# Allegro board 7A.brd
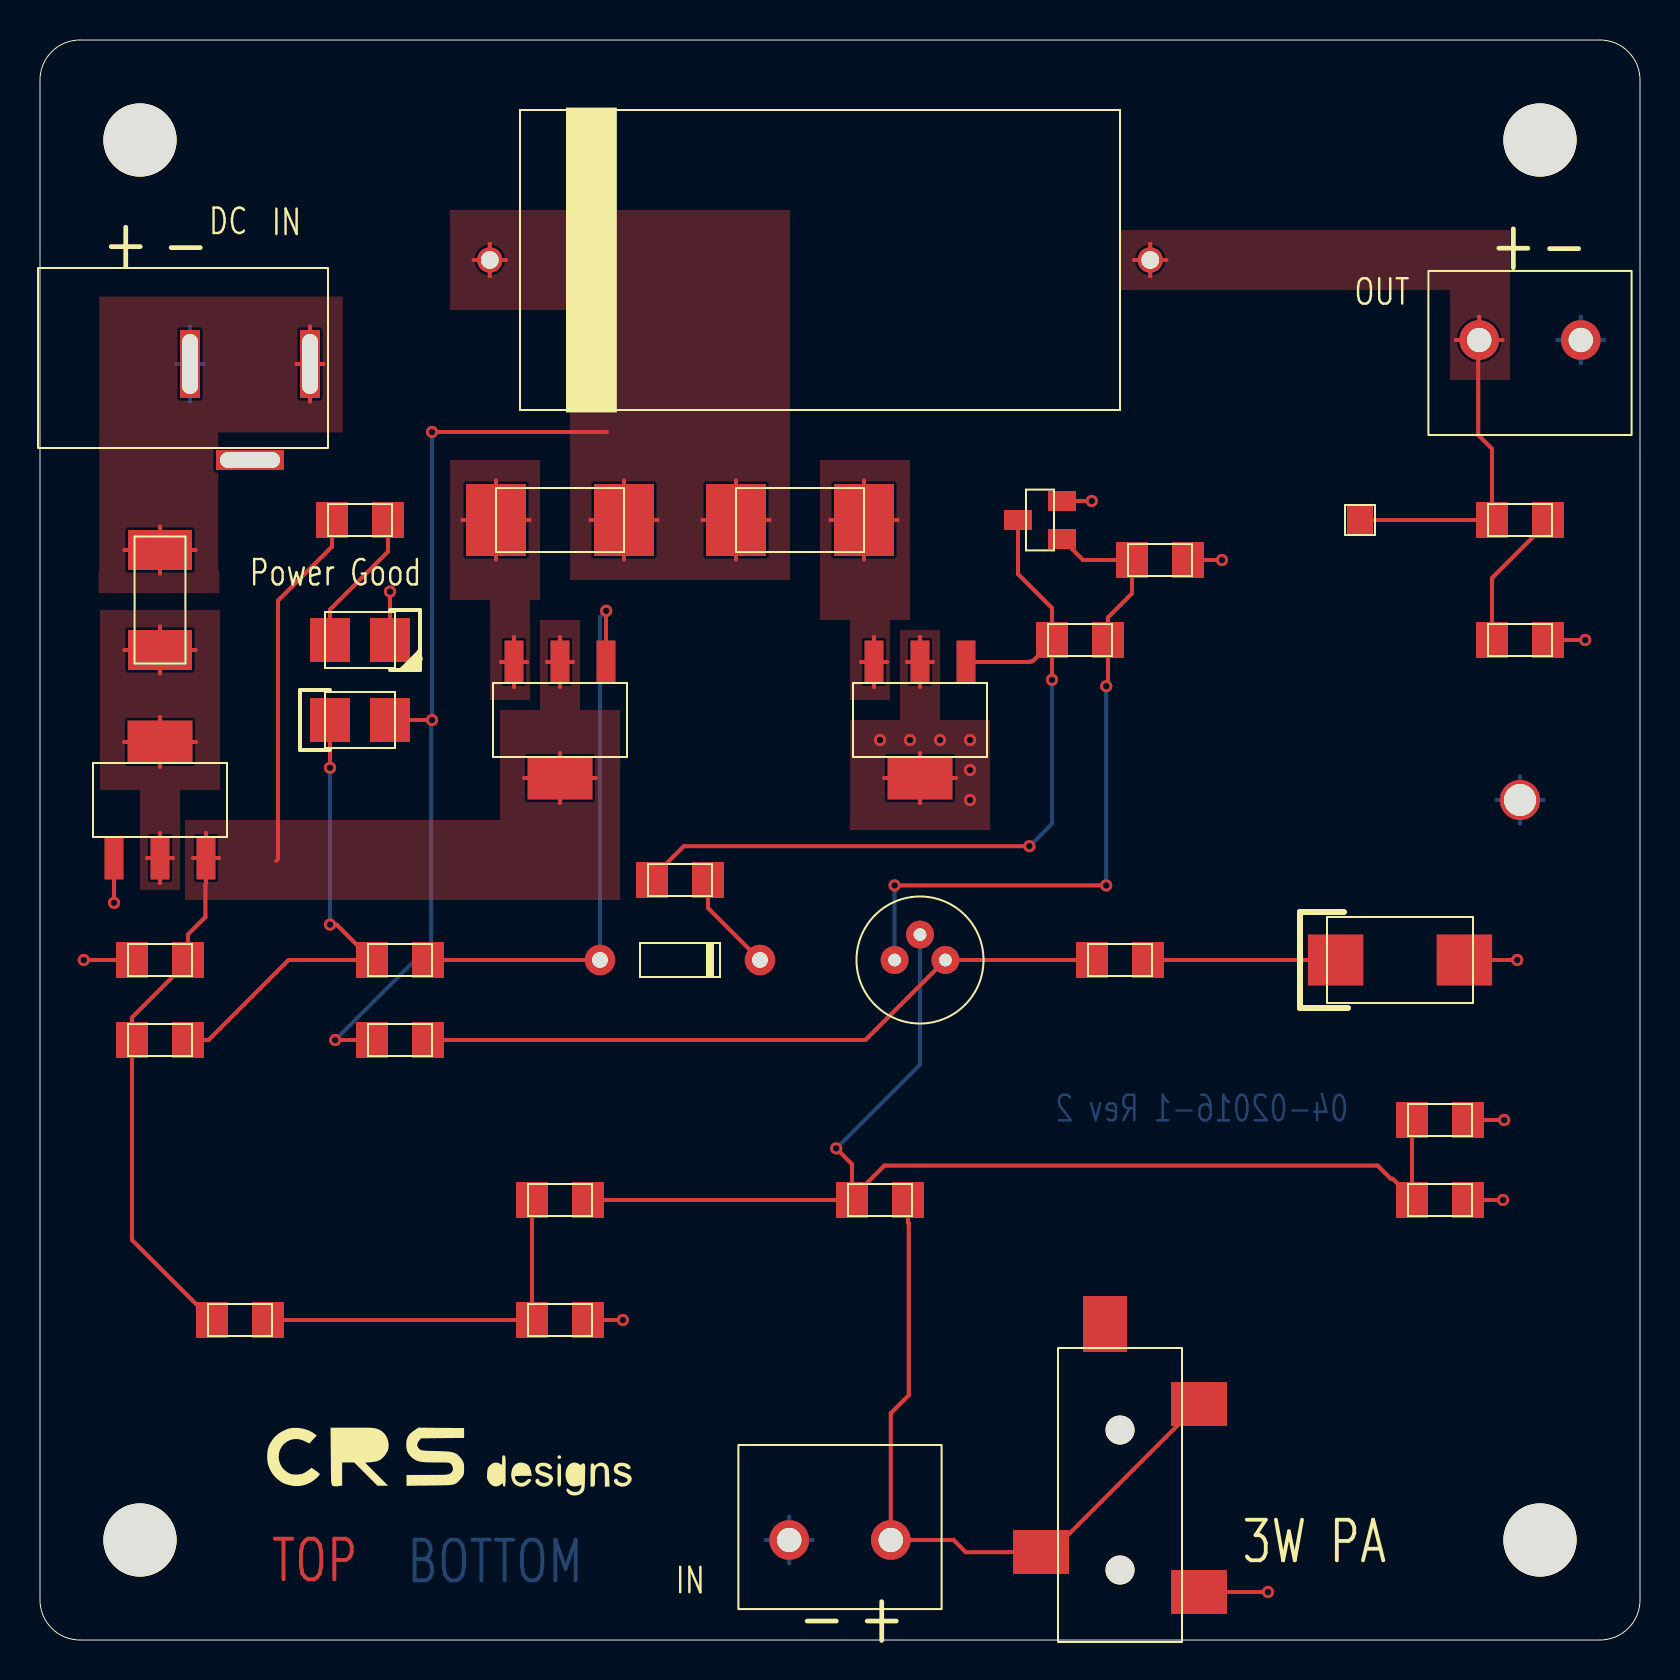
[diagram p0: board, top side]
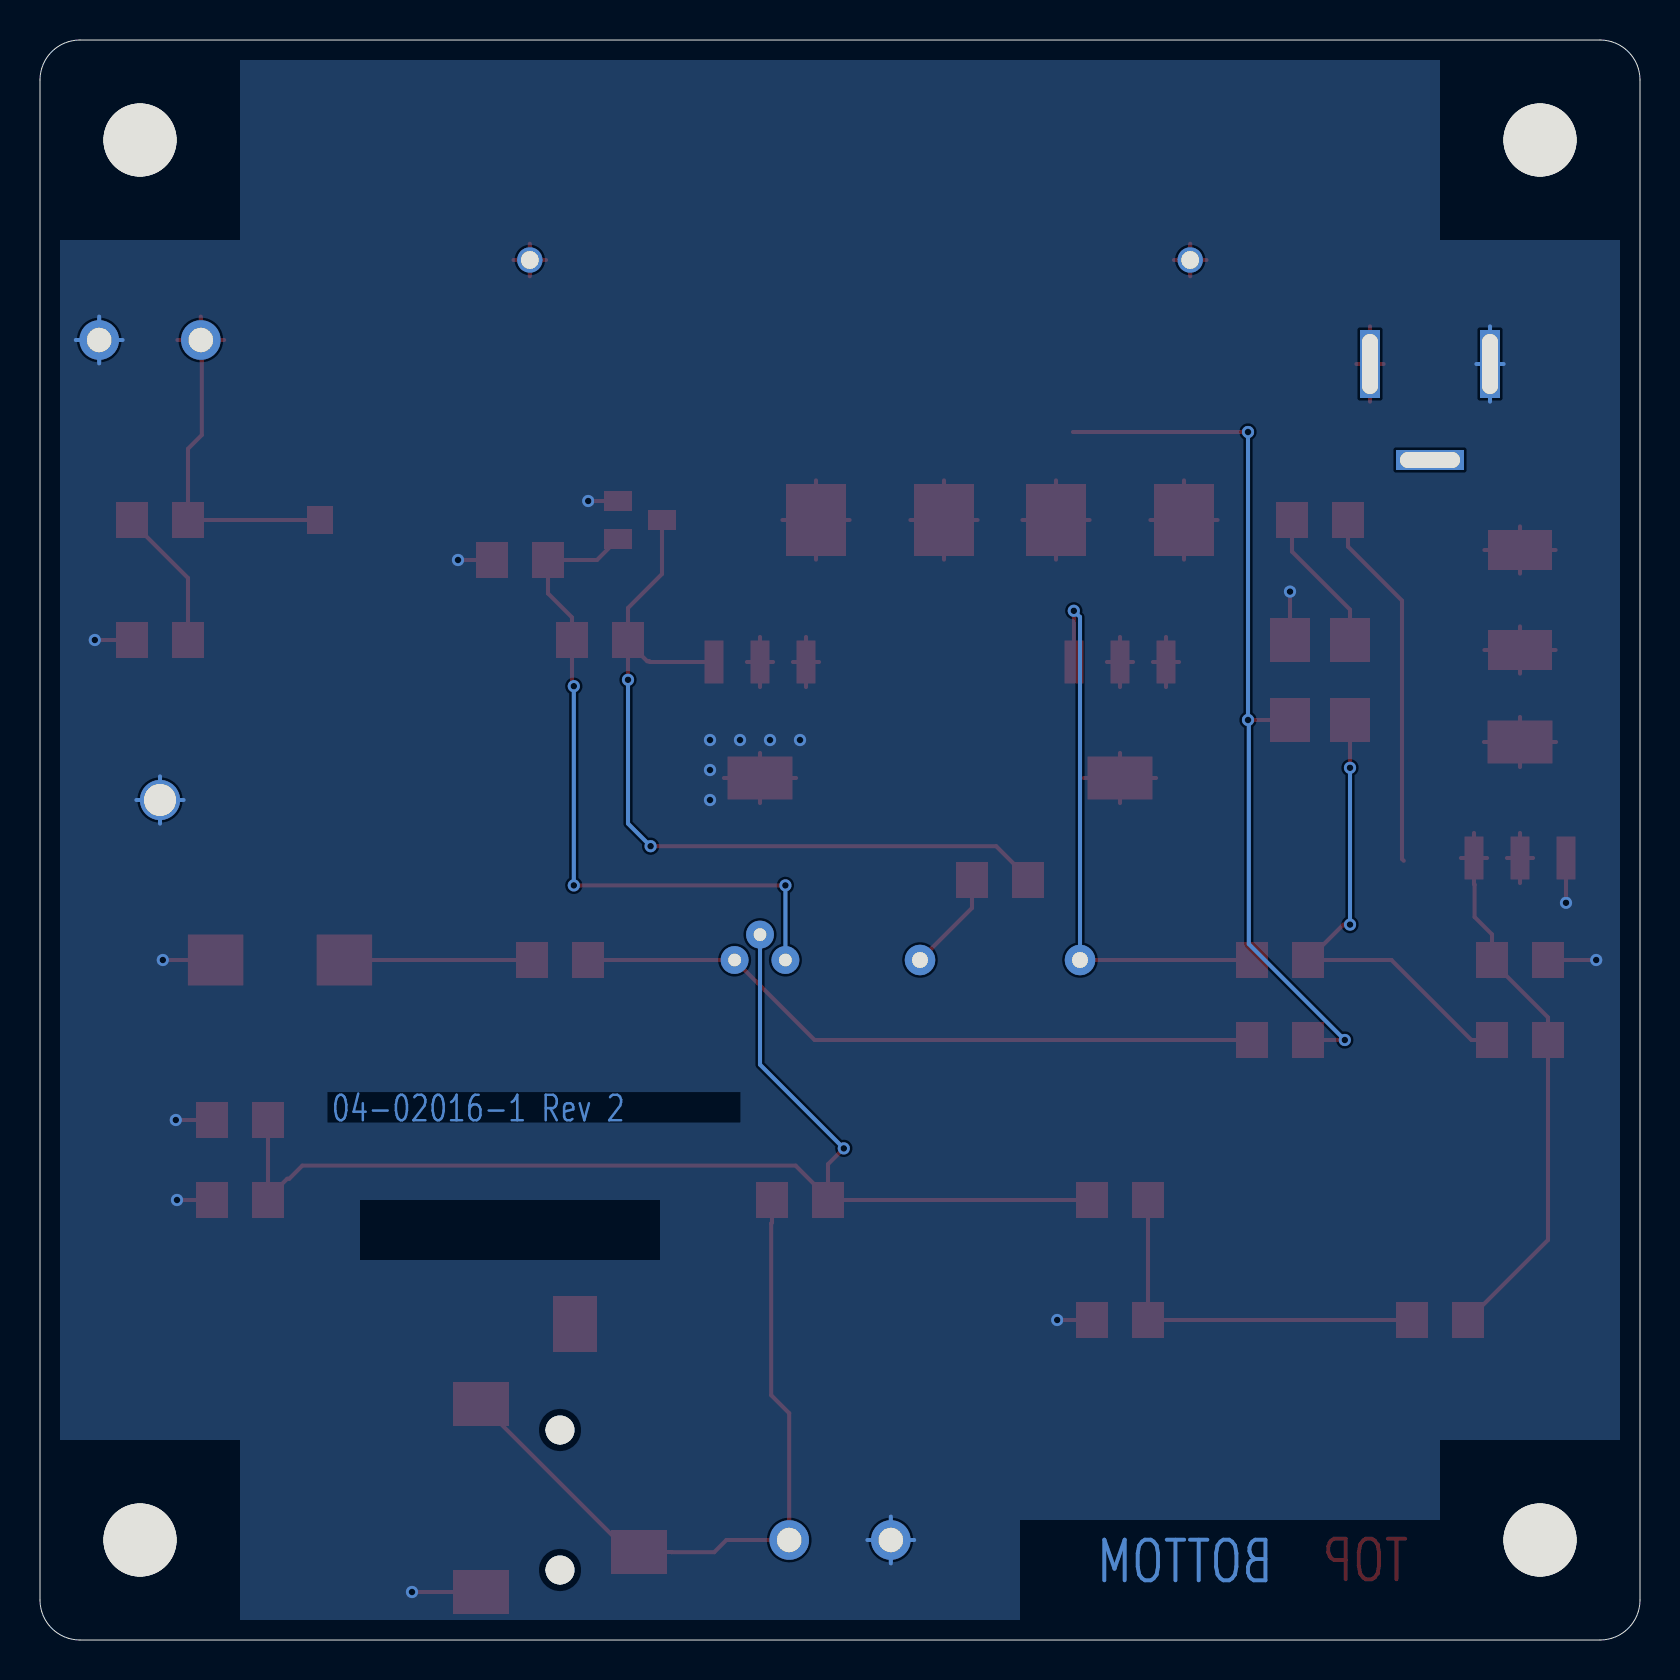
[diagram p1: board, bottom side, seen from below]

Outline 80 x 80 mm; copper layers: TOP, BOTTOM. Coordinates in mm from the lower left corner of the outline.
Outline path: 0,78 0,2 arc(0.59,0.59) 2,0 78,0 arc(79.41,0.59) 80,2 80,78 arc(79.41,79.41) 78,80 2,80 arc(0.59,79.41) 0,78

## Design rules (mm)
constraint set DEFAULT: min track width 0.203

## Placement (name value [footprint] x y rotation side)
C1  0.1u  [CAPC320160X100]  42 22 180 top
C2  10u  [CAPC320160X180]  26 16 0 top
C3  22p  [CAPC320160X100]  70 26 0 top
C4  100u  [CAPMP730430X430]  68 34 0 top
C5  47u  [CAPMP350280X210]  16 46 0 top
C6  22p  [CAPC320160X100]  52 50 180 top
C7  0.1  [CAPC320160X100]  6 34 180 top
C8  1000u  [CAPPA460W80L300D150B]  39 69 0 top
C9  0.1u  [CAPC320160X100]  74 50 0 top
D1  1N4148  [DIOAD800W060L400D170]  32 34 0 top
F1  VTR2/6125FF2-R  [FUSM610254X254]  6 52 90 top
J1  282837-2  [TE_282837-2]  40 5 90 top
J3  282837-2  [TE_282837-2]  74.5 65 270 top
J4  SJ-3524  [CUI_SJ3525]  54 0 90 top
J9  694106301002  [WURTH_694106301002]  10.5 59 90 top
LED1  150141BS73100  [LEDM320280X190]  16 50 180 top
NOREF  -  []  5 17 0 top
NOREF#2  -  [unnamed#2]  75 5 0 top
NOREF#3  -  [unnamed#2]  5 5 0 top
NOREF#4  -  []  11 7 0 top
NOREF#5  -  [unnamed#2]  75 75 0 top
NOREF#6  -  [unnamed#2]  5 75 0 top
Q1  2N5087  [TO18F]  44 34 0 top
Q2  2N3904  [SOT095P240X120-3]  50 56 180 top
Q3  FZT649  [SOT230P700X180-4]  26 46 270 top
Q4  FZT790A  [SOT230P700X180-4]  44 46 270 top
Q5  NDT2955  [SOT230P700X180-4]  6 42 90 top
R1  100k  [RESC320160X100]  10 16 0 top
R2  820k  [RESC320160X100]  26 22 0 top
R3  820k  [RESC320160X100]  70 22 0 top
R4  10k  [RESC320160X100]  56 54 0 top
R5  120  [RESC320160X100]  54 34 0 top
R6  2.7k  [RESC320160X100]  18 30 180 top
R7  220  [RESC320160X100]  6 30 0 top
R8  220  [RESC320160X100]  18 34 0 top
R9  18  [RESC320160X100]  32 38 180 top
R10  0.82  [RESC640320X070]  26 56 0 top
R11  0.82  [RESC640320X070]  38 56 0 top
R12  1  [RESC320160X100]  74 56 0 top
R14  15.0k  [RESC320160X100]  16 56 180 top
TP1  TEST POINT  [KEYSTONE_5010]  74 42 0 top
TP2  T POINT F  [TP_1_3X1_4]  66 56 0 top

## Library data of the parts
C1-C3 C6 C7 C9 = C
C4 C5 C8 = CP
D1 = DIODE_0
F1 = SST_0
J1 J3 = JUMPER
J4 = TRS_Jack
J9 = BARREL JACK
LED1 = SFH4650
Q1 = PNP_1
Q2 = NPN_1
Q3 = NPN_0
Q4 = PNP_2
Q5 = MOSFET-4_0
R1-R12 R14 = RESISTOR
TP1 = TEST POINT
TP2 = T POINT F

## Footprints (pads in the part's own frame, mm; a bottom-side part is the same pattern mirrored in y, then rotated)
CAPC320160X100
  rect 1.6x1.8 smd: 1(-1.4,0) 2(1.4,0)
CAPC320160X180
  rect 1.6x1.8 smd: 1(-1.4,0) 2(1.4,0)
CAPMP350280X210
  rect 2x2.2 smd: 1(-1.5,0) 2(1.5,0)
CAPMP730430X430
  rect 2.77x2.55 smd: 1(-3.22,0) 2(3.22,0)
CAPPA460W80L300D150B
  round 1.27 hole 0.889: 1(-16.51,0) 2(16.51,0)
CUI_SJ3525
  round 1.446 hole 1.7 unplated: (3.5,0) (10.5,0)
  rect 2.2x2.8 smd: 1(2.4,-3.95) 2(11.8,-3.95) 3(4.4,3.95)
  rect 2.8x2.2 smd: 4(15.8,0.75)
DIOAD800W060L400D170
  round 1.524 hole 0.787: 1(-4,0) 2(4,0)
FUSM610254X254
  rect 2x3.2 smd: 1(-2.5,0) 2(2.5,0)
KEYSTONE_5010
  round 2.007 hole 1.6: 1(0,0)
LEDM320280X190
  rect 2x2.2 smd: 1(-1.5,0) 2(1.5,0)
RESC320160X100
  rect 1.6x1.8 smd: 1(-1.4,0) 2(1.4,0)
RESC640320X070
  rect 3x3.6 smd: 1(-3.2,0) 2(3.2,0)
SOT095P240X120-3
  rect 1.4x1 smd: 1(-1.1,0.95) 2(-1.1,-0.95) 3(1.1,0)
SOT230P700X180-4
  rect 2.15x0.95 smd: 1(-2.9,2.3) 2(-2.9,0) 3(-2.9,-2.3)
  rect 2.15x3.25 smd: 4(2.9,0)
TE_282837-2
  round 1.981 hole 1.219: 1(0,2.54) 2(0,-2.54)
TO18F
  round 1.397 hole 0.635: 1(1.27,0) 2(0,1.27) 3(-1.27,0)
TP_1_3X1_4
  rect 1.3x1.4 smd: 1(0,0)
unnamed#2
  round 3.658 hole 3.912 unplated: (0,0)
WURTH_694106301002
  rect 3.4x1 hole 3x0.8: 1(4.8,-3) 2(4.8,3)
  rect 1x3.4 hole 0.8x3: 3(0,0)

## Nets
GND: C2.2 C3.2 C4.2 C7.2 C9.2 J1.1 J3.1 J4.1 J9.2(TIP2) LED1.1 Q2.2(E) Q4.2 Q4.4 Q5.1 R3.2 R4.2 TP1.1
VBUS: C7.1 Q3.2 Q3.4 Q5.3(S) R1.1 R7.1 R14.2
VIN: C1.1 J1.2 J4.2(TIP2) J4.3
DC1: C2.1 R1.2 R2.1
DC2: C4.1 R5.2
DC3: C5.1 R7.2 R8.1
DC4: D1.2(K) R9.1
DC5: C9.1 R12.2
VB1: C1.2 C3.1 Q1.2 R2.2 R3.1
VB2: C6.1 Q1.3 Q2.1 R4.1
VB3: D1.1 Q3.1 R8.2
VB4: C6.2 Q2.3 Q4.1 R9.2
VE1: Q1.1(EMITTER) R5.1 R6.1
VE3: Q3.3(E) R10.1
VE4: Q4.3(EMITTER) R11.2
VF: F1.1 Q5.2 Q5.4
VMID: C5.2 C8.1 R6.2 R10.2 R11.1
VOUT: C8.2 J3.2 R12.1 TP2.1(TP)
VSUPPLY: F1.2 J9.1
N3193430: LED1.2 R14.1

Pads without a net: J4 4; J9 3

## Via types
v1: diameter 0.61, hole 0.33, TOP to BOTTOM, 29 vias

## Routing (per net, layer and track width the routed paths; a pad name or vN(x,y) marks a point on that pad's centre or on a via; arc(x,y) is an arc through that point)
GND: length 52.6
  TOP w0.203: C2.2 v1(29.14,16) ; 43.35,48.9 Q4.2 ; Q4.2 44,50.15 ; Q4.2 44,47.65 ; Q4.2 44.65,48.9 ; LED1.1 v1(17.5,52.42) ; 42.2,43.1 Q4.4 ; Q4.4 45.8,43.1 ; Q4.4 44,44.35 ; Q4.4 44,41.85 ; C9.2 v1(77.26,50) ; C3.2 v1(73.21,26) ; C7.2 v1(2.19,34) ; R3.2 v1(73.15,22) ; C4.2 v1(73.86,34) ; Q2.2 v1(52.59,56.95) ; v1(3.7,36.86) Q5.1 ; R4.2 v1(59.1,54) ; J4.1 v1(61.4,2.4)
  BOTTOM w0.203: 72.82,42 TP1.1 ; TP1.1 74,40.82 ; TP1.1 74,43.18 ; TP1.1 75.18,42 ; J1.1 37.46,6.17 ; J1.1 36.29,5 ; J1.1 37.46,3.83 ; J1.1 38.63,5 ; J3.1 78.21,65 ; J3.1 77.04,63.83 ; J3.1 77.04,66.17 ; J3.1 75.87,65 ; 6.82,63.8 J9.2 ; J9.2 8.18,63.8 ; J9.2 7.5,61.92 ; J9.2 7.5,65.68
  vias: v1(42,45) v1(43.5,45) v1(45,45) v1(46.5,45) v1(46.5,43.5) v1(46.5,42)
VBUS: length 57
  TOP w0.203: Q5.3 8.95,39.1 ; Q5.3 7.65,39.1 ; Q5.3 8.3,40.35 ; Q5.3 8.3,37.8 8.27,37.77 8.27,36.15 7.4,35.28 C7.1 7.4,33.93 4.6,31.13 R7.1 4.6,20 R1.1 ; 11.81,38.96 11.9,39.05 11.9,51.97 14.6,54.67 R14.2 ; Q3.2 26.65,48.9 ; Q3.2 26,50.15 ; Q3.2 26,47.65 ; Q3.2 25.35,48.9 ; 26,41.85 Q3.4 ; Q3.4 27.8,43.1 ; Q3.4 24.2,43.1 ; Q3.4 26,44.35
VIN: length 36.1
  TOP w0.203: J4.2 50.55,4.4 J4.3 48.42,4.4 48.41,4.39 46.29,4.39 45.68,5 J1.2 42.54,11.34 43.44,12.24 43.44,20.83 43.4,20.87 C1.1
DC1: length 19.2
  TOP w0.203: R1.2 C2.1 R2.1
DC2: length 9.4
  TOP w0.203: R5.2 C4.1
DC3: length 23.9
  TOP w0.203: C5.1 v1(14.5,43.61) ; v1(14.5,35.77) 14.83,35.77 R8.1 12.43,34 8.43,30 R7.2
  BOTTOM w0.203: v1(14.5,43.61) v1(14.5,35.77)
DC4: length 5.1
  TOP w0.203: R9.1 33.4,36.6 D1.2
DC5: length 7.2
  TOP w0.203: C9.1 72.6,53.1 75.4,55.9 R12.2
VB1: length 61.9
  TOP w0.203: 68.6,22.1 C3.1 ; 68.6,22.1 R3.1 ; 68.6,22.1 67.64,23.06 67.54,23.06 66.88,23.72 42.22,23.72 40.6,22.1 ; 40.6,22.1 40.6,23.79 v1(39.81,24.58) ; 40.6,22.1 C1.2 R2.2
  BOTTOM w0.203: Q1.2 44,28.77 v1(39.81,24.58)
VB2: length 35
  TOP w0.203: Q2.1 52.15,54 R4.1 54.6,52.33 53.4,51.13 C6.1 53.4,47.78 v1(53.31,47.69) ; v1(42.73,37.73) v1(53.31,37.73)
  BOTTOM w0.203: v1(53.31,37.73) v1(53.31,47.69) ; Q1.3 v1(42.73,37.73)
VB3: length 28.8
  TOP w0.203: Q3.1 28.3,51.45 v1(28.31,51.46) ; R8.2 D1.1
  BOTTOM w0.203: v1(28.31,51.46) 28,51.15 D1.1
VB4: length 41.8
  TOP w0.203: Q2.3 48.9,53.3 50.6,51.6 C6.2 50.6,49.9 ; 50.6,49.9 49.64,48.94 49.54,48.94 49.5,48.9 Q4.1 ; 50.6,49.9 v1(50.6,48.01) ; R9.2 30.6,38.1 32.19,39.69 v1(49.47,39.69)
  BOTTOM w0.203: v1(50.6,48.01) 50.6,40.82 v1(49.47,39.69)
VE1: length 34.9
  TOP w0.203: R6.1 41.27,30 Q1.1 R5.1
VE3: length 11.1
  TOP w0.203: R10.1 24.48,56 ; R10.1 22.8,54.02 ; R10.1 22.8,57.98 ; R10.1 21.12,56 ; 23.7,47.65 Q3.3 ; Q3.3 23.7,50.15 ; Q3.3 24.35,48.9 ; Q3.3 23.05,48.9
VE4: length 11.1
  TOP w0.203: 41.05,48.9 Q4.3 ; Q4.3 42.35,48.9 ; Q4.3 41.7,47.65 ; Q4.3 41.7,50.15 ; 39.52,56 R11.2 ; R11.2 41.2,54.02 ; R11.2 41.2,57.98 ; R11.2 42.88,56
VF: length 15.8
  TOP w0.203: 6,37.85 Q5.2 ; Q5.2 6.65,39.1 ; Q5.2 5.35,39.1 ; Q5.2 6,40.35 ; 4.2,44.9 Q5.4 ; Q5.4 6,46.15 ; Q5.4 7.8,44.9 ; Q5.4 6,43.65 ; F1.1 6,50.68 ; F1.1 4.22,49.5 ; F1.1 7.78,49.5 ; F1.1 6,48.32
VMID: length 63
  TOP w0.203: v1(19.6,60.4) 28.35,60.4 ; C5.2 v1(19.6,46) ; R11.1 36.48,56 ; R11.1 34.8,57.98 ; R11.1 34.8,54.02 ; R11.1 33.12,56 ; C8.1 22.49,69.81 ; C8.1 22.49,68.19 ; C8.1 23.3,69 ; C8.1 21.68,69 ; R10.2 29.2,57.98 ; R10.2 29.2,54.02 ; R10.2 27.52,56 ; R10.2 30.88,56 ; R6.2 v1(14.76,30)
  BOTTOM w0.203: v1(14.76,30) 19.56,34.8 19.56,45.96 v1(19.6,46) v1(19.6,60.4)
VOUT: length 22.7
  TOP w0.203: C8.2 56.32,69 ; C8.2 55.51,68.19 ; C8.2 55.51,69.81 ; C8.2 54.7,69 ; J3.2 73.13,65 ; J3.2 70.79,65 ; J3.2 71.96,66.17 ; J3.2 71.96,64.07 71.91,64.02 71.91,60.25 72.6,59.56 R12.1 TP2.1
VSUPPLY: length 11
  TOP w0.203: 4.22,54.5 F1.2 ; F1.2 7.78,54.5 ; F1.2 6,55.68 ; F1.2 6,53.32 ; J9.1 14.18,63.8 ; J9.1 13.5,65.68 ; J9.1 12.82,63.8 ; J9.1 13.5,61.92
N3193430: length 7.2
  TOP w0.203: LED1.2 14.5,51.52 17.4,54.42 R14.1

## Copper pours and planes (outline as drawn; the poured copper is in the pictures)
GND on TOP: 43,50.5 45,50.5 45,46 47.5,46 47.5,40.5 40.5,40.5 40.5,46 43,46
GND on BOTTOM: 10,79 70,79 70,70 79,70 79,10 70,10 70,1 31,1 31,6 10,6 10,10 1,10 1,70 10,70 ; 1 cut-out
VBUS on TOP: 25,51 27,51 27,46.5 29,46.5 29,37 7.25,37 7.25,41 23,41 23,46.5 25,46.5
VE3 on TOP: 20.5,59 25,59 25,52 24.5,52 24.5,47 22.5,47 22.5,52 20.5,52
VE4 on TOP: 39,59 43.5,59 43.5,51 42.5,51 42.5,47 40.5,47 40.5,51 39,51
VF on TOP: 3,51.5 9,51.5 9,42.5 7,42.5 7,37.5 5,37.5 5,42.5 3,42.5
VMID on TOP: 20.5,71.5 37.5,71.5 37.5,53 26.5,53 26.5,66.5 20.5,66.5
VOUT on TOP: 54,70.5 73.5,70.5 73.5,63 70.5,63 70.5,67.5 54,67.5
VSUPPLY on TOP: 2.96,67.17 15.14,67.17 15.14,60.38 8.91,60.38 8.91,53.43 8.97,53.43 8.97,52.34 2.93,52.34 2.93,53.43 2.96,53.43

## Text on the board
BOTTOM: BOTTOM | 04-02016-1 Rev 2
Board Geometry/Soldermask Bottom: SOLDERMASK BOTTOM
User.Comments: CRS designs | 72 William Street | Walpole, MA 02081 | Phone: (617) 462-0786 | Drawn: C. R. Shappee | Drawing Number: | 2020-05-08
TOP: TOP
Ref Des/Assembly Top: ASSEMBLY TOP
Board Geometry/Soldermask Top: SOLDERMASK TOP
Package Geometry/Pastemask Top: PASTEMASK TOP
Ref Des/Silkscreen Top: SILKSCREEN TOP | DC | Power Good | IN | OUT | 3W PA | + | -
XSECTION_CHART: *  SURFACE - AIR 0 MM | *  DIELECTRIC - EPOXY_INK_UV_CURE 0.01 MM | *  DIELECTRIC - SOLDERMASK_FLEXIBLE_LPI 0.015 MM | L1 TOP CONDUCTOR - 1OZ_COPPER 0.03556 MM | *  DIELECTRIC - FR-4 1.4 MM | L2 BOTTOM CONDUCTOR - 1OZ_COPPER 0.03556 MM | DESIGN CROSS SECTION CHART | ___________________________ | TOTAL THICKNESS 1.52 MM | 1-2 | FABRICATION
PLACE_BOUND_TOP: 04-02016-1
PCBA PART NUMBER: Not Assigned
DRAFTING: Hole sizes on capacitor, | hole sizes on diode and Q1 | annular ring | Hole sizes on screw tierminal jacs.  I htink this | has been updated, just the symbol needs to be refresed. | The symbol was update in XADC
User.7: FIGURE | FINISHED_SIZE | 0.3302 | 0.635 | 0.7874 | 0.889 | 0.9144 | 1.6002 | 1.7 | 3.9116 | DRILL CHART: TOP to BOTTOM | ALL UNITS ARE IN MILLIMETERS | TOOL_SIZE | - | 70 | 65 | 62 | 60 | 51 | 23 | PLATED | NON-PLATED | QTY | 28 | 3 | 2 | 6 | 1 | 4
User.8: DRILL DRAWING
